# Altium PCB PCB2.PcbDoc
Units mil, origin at the board's own origin, x right, y up, seen from the top; angles counter-clockwise.
Board outline 4825 x 4250 mil, 2 copper layers (Top Layer, Bottom Layer); 112 components, 78 nets, 288 pads, 32 vias.
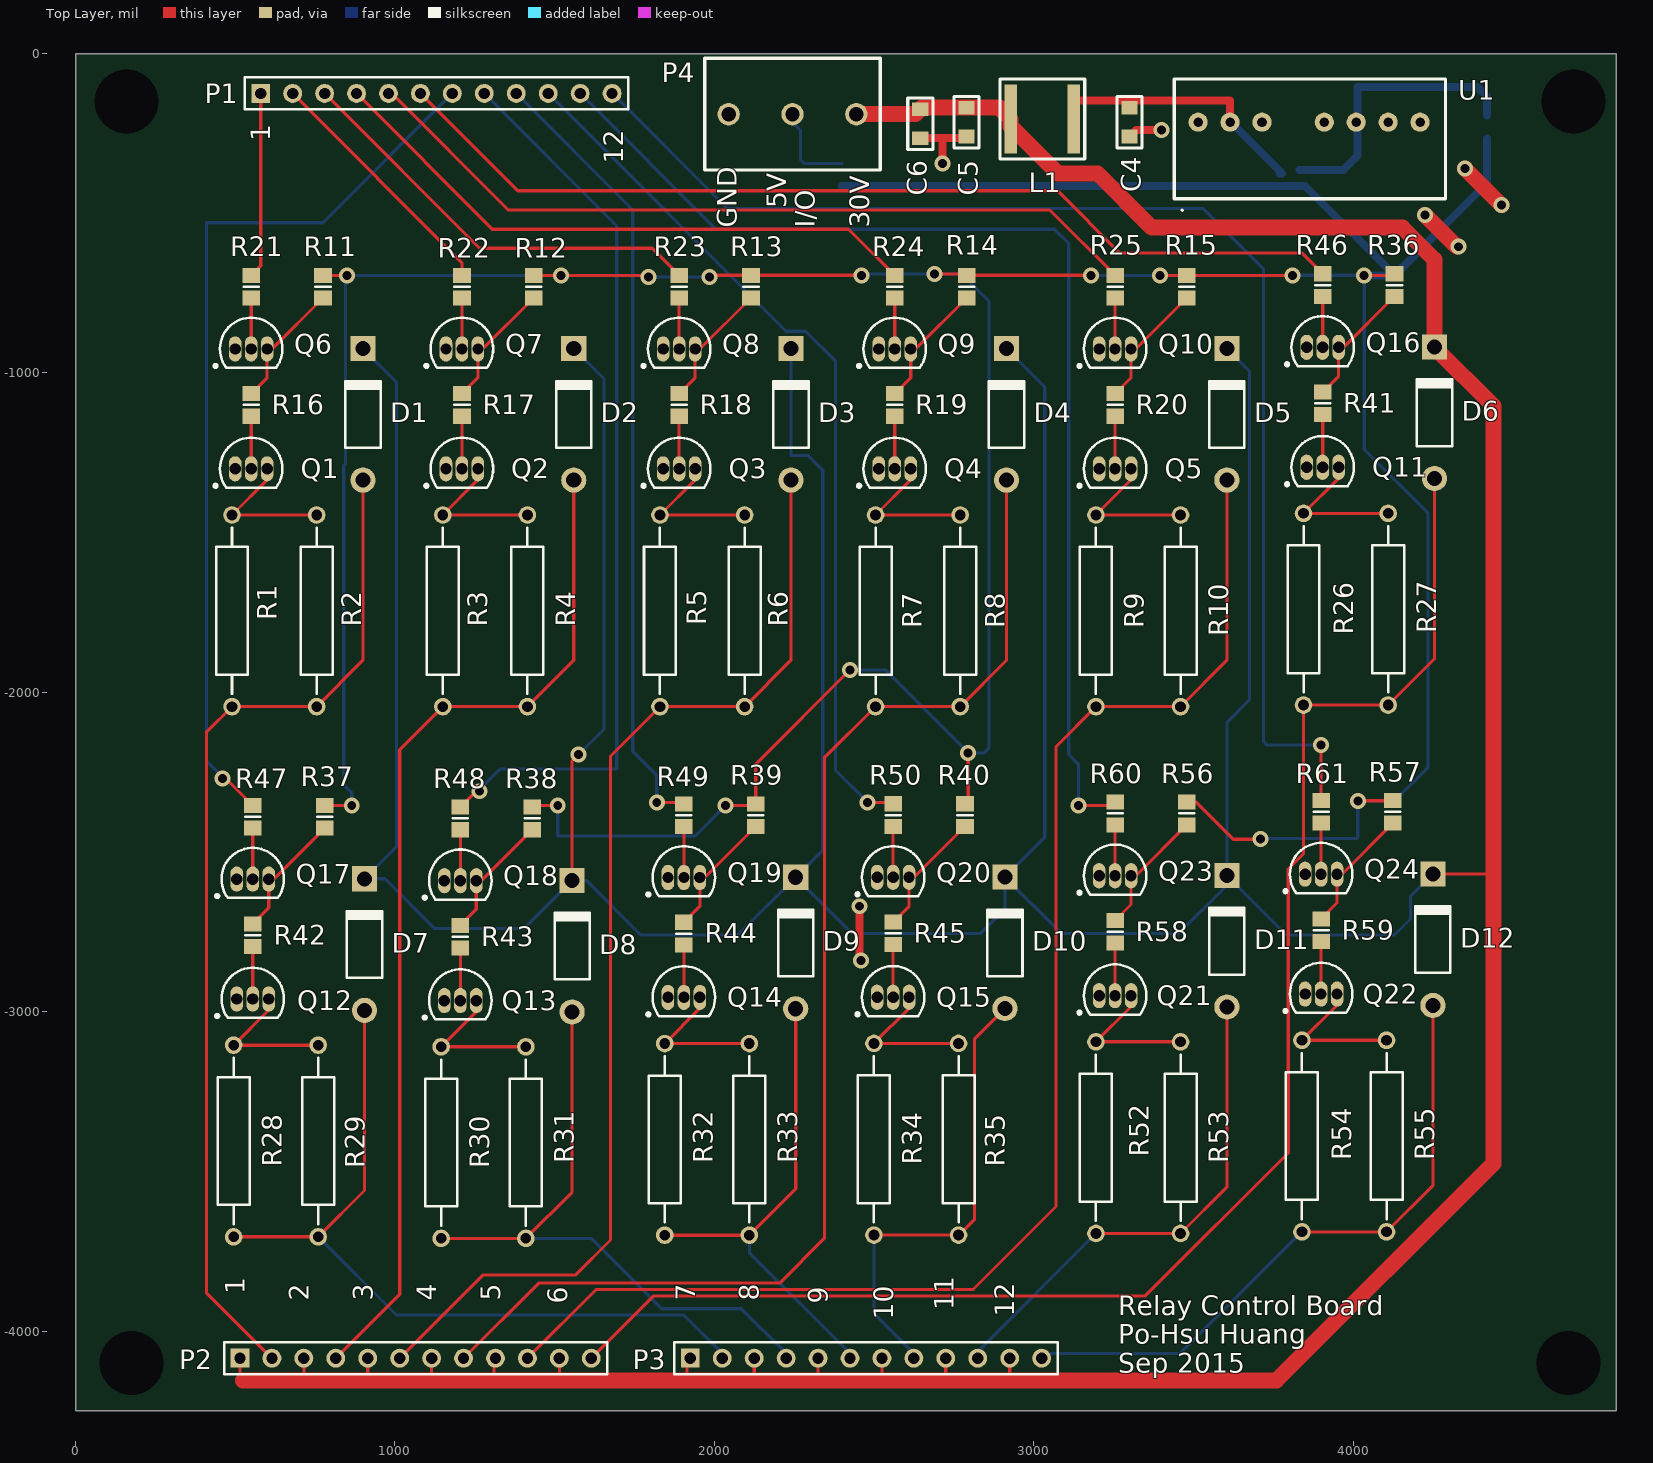
[diagram p0: Top Layer view]
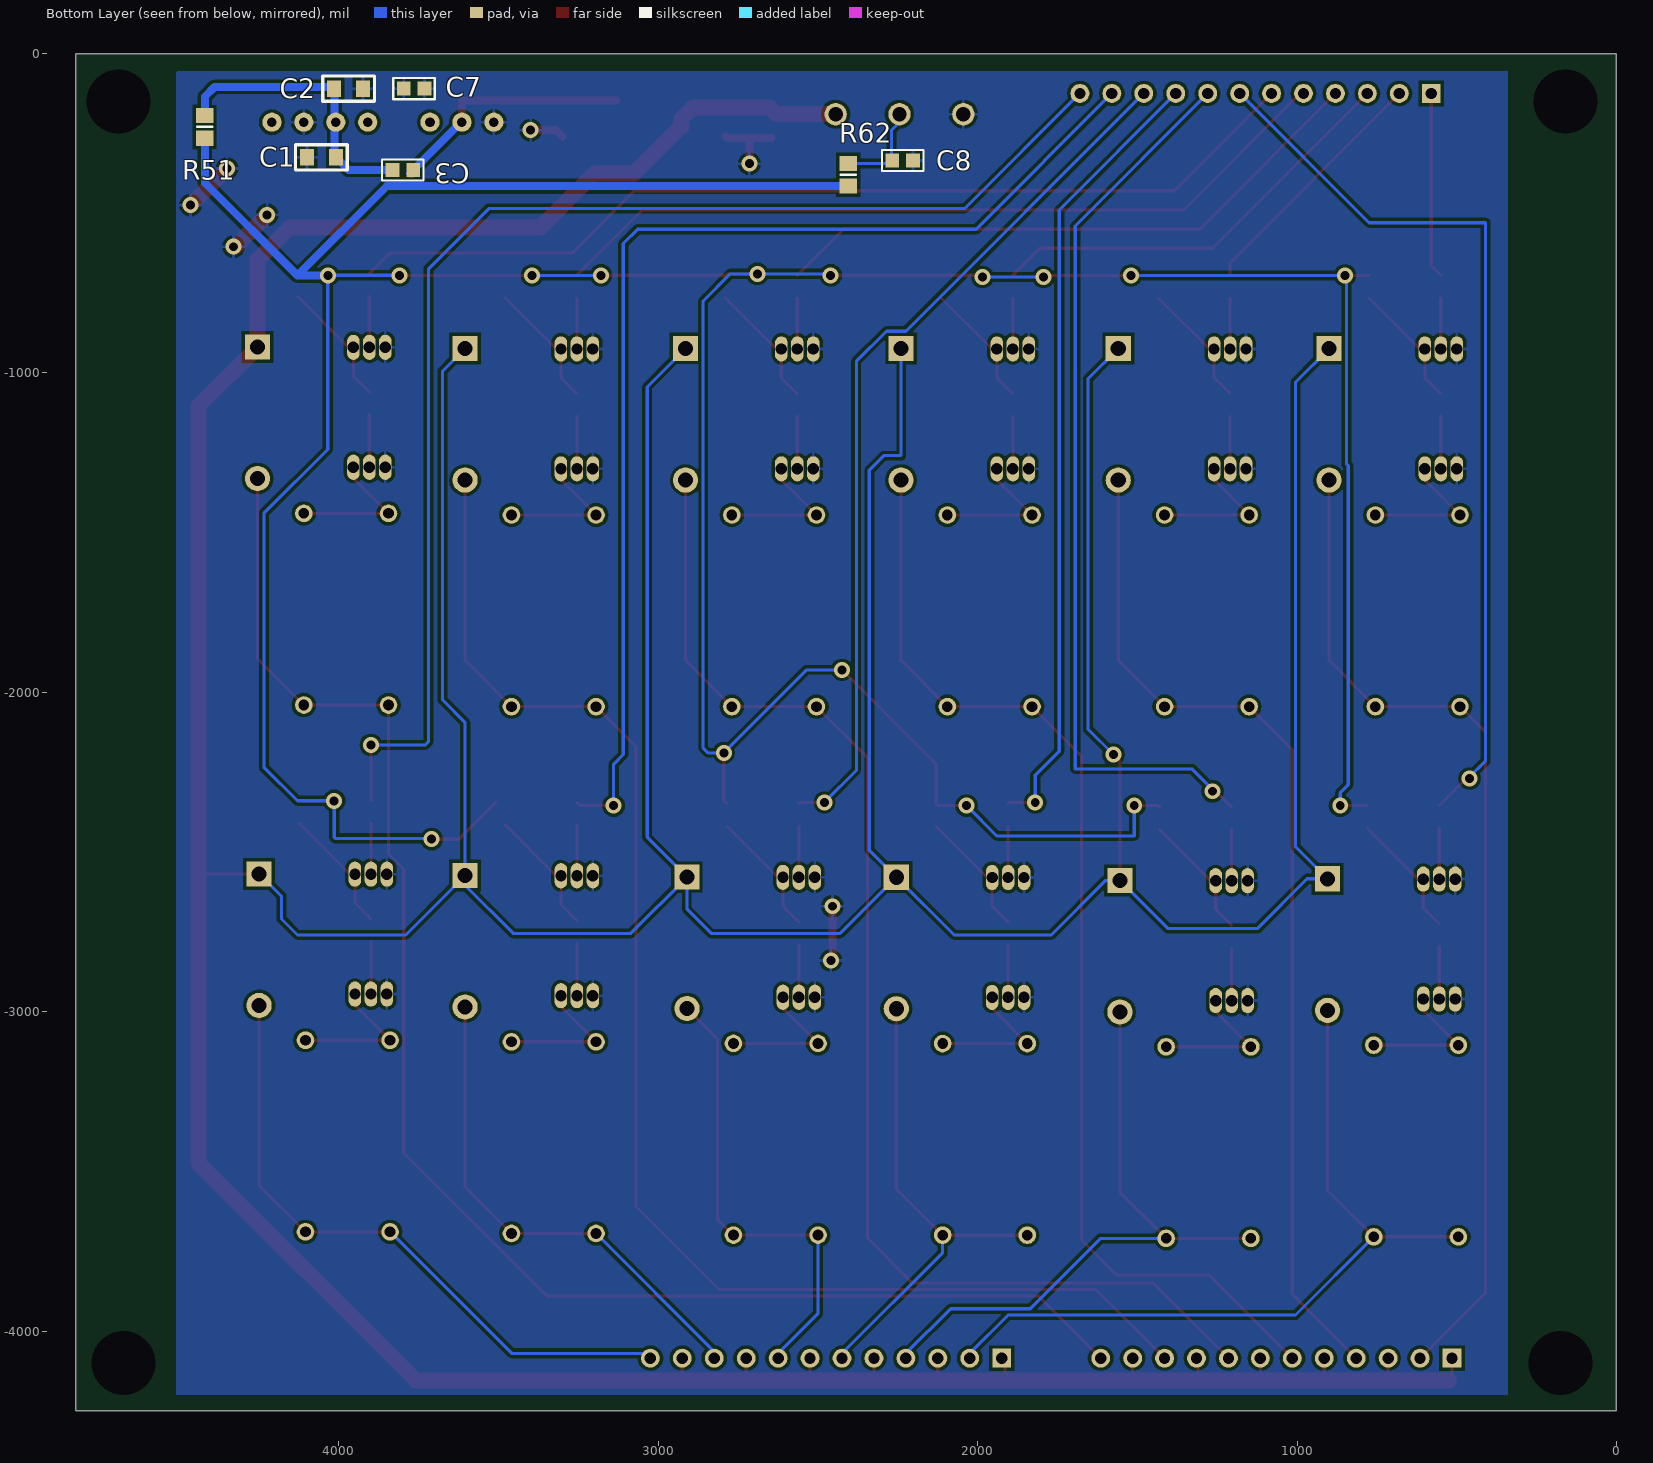
[diagram p1: Bottom Layer view, seen from below]

## Layer stack, top to bottom
Top Solder: solder mask 0.4, Solder Resist, Dk 3.5
Top Layer: signal copper 1.4
Dielectric 1: dielectric 12.6, FR-4, Dk 4.8
Bottom Layer: signal copper 1.4
Bottom Solder: solder mask 0.4, Solder Resist, Dk 3.5

## Board outline
0,0 0,-4250 4825,-4250 4825,0 0,0

## Design rules (kind name [scope] priority, off if disabled: settings)
Clearance [All] p1: gap=10
HoleSize [All] p1: absolutevalues=TRUE maxlimit=300 minlimit=1 maxpercent=80.000 minpercent=20.000
PolygonConnect [All] p1: connectstyle=Relief reliefconductorwidth=10 reliefentries=4 polygonreliefangle="90 Angle" airgapwidth=10
RoutingVias [All] p1: holewidth=28 width=50 viastyle="Through Hole" minholewidth=28 minwidth=50 maxholewidth=28 maxwidth=50
SolderMaskExpansion [All] p1: expansion=4
Width [All] p1: maxlimit=100 minlimit=10 preferedwidth=10 minimp=50.000000 maximp=50.000000 favimp=50.000000
29 further rules are at their usual default settings.

## Components (designator, comment, footprint, x,y, rotation, side; value= is the part's Value field where it differs from the comment)
C1 "Cap 0603" "0805 (2012 metric)" 4055,-325 r0 bottom
C2 "Cap 0603" "0805 (2012 metric)" 3970,-110 r180 bottom
C3 "Cap 0603" "0603 (1608 Metric)" 3800,-365 r0 bottom
C4 "Cap 0603" "0805 (2012 metric)" 3300,-215 r90 top
C5 "Cap 0603" "0805 (2012 metric)" 2790,-215 r90 top
C6 "Cap 0603" "0805 (2012 metric)" 2645,-220 r90 top
C7 "Cap 0603" "0603 (1608 Metric)" 3765,-110 r0 bottom
C8 "Cap 0603" "0603 (1608 Metric)" 2235,-335 r0 bottom
D1 "Diode SB140" DO-41 900,-1130 r90 top
D2 "Diode SB140" DO-41 1560,-1130 r90 top
D3 "Diode SB140" DO-41 2240,-1130 r90 top
D4 "Diode SB140" DO-41 2915,-1130 r90 top
D5 "Diode SB140" DO-41 3605,-1130 r90 top
D6 "Diode SB140" DO-41 4255,-1125 r90 top
D7 "Diode SB140" DO-41 905,-2790 r90 top
D8 "Diode SB140" DO-41 1555,-2795 r90 top
D9 "Diode SB140" DO-41 2255,-2785 r90 top
D10 "Diode SB140" DO-41 2910,-2784.57 r90 top
D11 "Diode SB140" DO-41 3605,-2779.57 r90 top
D12 "Diode SB140" DO-41 4250,-2774.57 r90 top
L1 "Inductor 10uH" "Inductor Surface Mount" 3125,-205 r90 top
P1 "Header 12" HDR1X12 580,-125 r0 top
P2 "Header 12" HDR1X12 515,-4085 r0 top
P3 "Header 12" HDR1X12 1925,-4085 r0 top
P4 "Header 20mils" Header_20mils 2445,-190 r180 top
Q1 "2N3904" TO-92A 550,-1300.43 r270 top
Q2 "2N3904" TO-92A 1210,-1300.43 r270 top
Q3 "2N3904" TO-92A 1890,-1300.43 r270 top
Q4 "2N3904" TO-92A 2565,-1300.43 r270 top
Q5 "2N3904" TO-92A 3255,-1300.43 r270 top
Q6 "2N3904" TO-92A 550,-925 r270 top
Q7 "2N3904" TO-92A 1210,-925 r270 top
Q8 "2N3904" TO-92A 1890,-925 r270 top
Q9 "2N3904" TO-92A 2565,-925 r270 top
Q10 "2N3904" TO-92A 3255,-925 r270 top
Q11 "2N3904" TO-92A 3905,-1295.43 r270 top
Q12 "2N3904" TO-92A 555,-2960.43 r270 top
Q13 "2N3904" TO-92A 1205,-2965.43 r270 top
Q14 "2N3904" TO-92A 1905,-2955.43 r270 top
Q15 "2N3904" TO-92A 2560,-2955 r270 top
Q16 "2N3904" TO-92A 3905,-920 r270 top
Q17 "2N3904" TO-92A 555,-2585 r270 top
Q18 "2N3904" TO-92A 1205,-2590 r270 top
Q19 "2N3904" TO-92A 1905,-2580 r270 top
Q20 "2N3904" TO-92A 2560,-2579.57 r270 top
Q21 "2N3904" TO-92A 3255,-2950 r270 top
Q22 "2N3904" TO-92A 3900,-2945 r270 top
Q23 "2N3904" TO-92A 3255,-2574.57 r270 top
Q24 "2N3904" TO-92A 3900,-2569.57 r270 top
R1 "Res1" AXIAL-0.6 490,-1745 r270 top
R2 "Res1" AXIAL-0.6 755,-1745 r270 top
R3 "Res1" AXIAL-0.6 1150,-1745 r270 top
R4 "Res1" AXIAL-0.6 1415,-1745 r270 top
R5 "Res1" AXIAL-0.6 1830,-1745 r270 top
R6 "Res1" AXIAL-0.6 2095,-1745 r270 top
R7 "Res1" AXIAL-0.6 2505,-1745 r270 top
R8 "Res1" AXIAL-0.6 2770,-1745 r270 top
R9 "Res1" AXIAL-0.6 3195,-1745 r270 top
R10 "Res1" AXIAL-0.6 3460,-1745 r270 top
R11 "Res1" 6-0805_N 775,-730 r90 top
R12 "Res1" 6-0805_N 1435,-730 r90 top
R13 "Res1" 6-0805_N 2115,-730 r90 top
R14 "Res1" 6-0805_N 2790,-730 r90 top
R15 "Res1" 6-0805_N 3480,-730 r90 top
R16 "Res1" 6-0805_N 550,-1100.43 r90 top
R17 "Res1" 6-0805_N 1210,-1100.43 r90 top
R18 "Res1" 6-0805_N 1890,-1100.43 r90 top
R19 "Res1" 6-0805_N 2565,-1100.43 r90 top
R20 "Res1" 6-0805_N 3255,-1100.43 r90 top
R21 "Res1" 6-0805_N 550,-730 r90 top
R22 "Res1" 6-0805_N 1210,-730 r90 top
R23 "Res1" 6-0805_N 1890,-730 r90 top
R24 "Res1" 6-0805_N 2565,-730 r90 top
R25 "Res1" 6-0805_N 3255,-730 r90 top
R26 "Res1" AXIAL-0.6 3845,-1740 r270 top
R27 "Res1" AXIAL-0.6 4110,-1740 r270 top
R28 "Res1" AXIAL-0.6 495,-3405 r270 top
R29 "Res1" AXIAL-0.6 760,-3405 r270 top
R30 "Res1" AXIAL-0.6 1145,-3410 r270 top
R31 "Res1" AXIAL-0.6 1410,-3410 r270 top
R32 "Res1" AXIAL-0.6 1845,-3400 r270 top
R33 "Res1" AXIAL-0.6 2110,-3400 r270 top
R34 "Res1" AXIAL-0.6 2500,-3399.57 r270 top
R35 "Res1" AXIAL-0.6 2765,-3399.57 r270 top
R36 "Res1" 6-0805_N 4130,-725 r90 top
R37 "Res1" 6-0805_N 780,-2390 r90 top
R38 "Res1" 6-0805_N 1430,-2395 r90 top
R39 "Res1" 6-0805_N 2130,-2385 r90 top
R40 "Res1" 6-0805_N 2785,-2384.57 r90 top
R41 "Res1" 6-0805_N 3905,-1095.43 r90 top
R42 "Res1" 6-0805_N 555,-2760.43 r90 top
R43 "Res1" 6-0805_N 1205,-2765.43 r90 top
R44 "Res1" 6-0805_N 1905,-2755.43 r90 top
R45 "Res1" 6-0805_N 2560,-2755 r90 top
R46 "Res1" 6-0805_N 3905,-725 r90 top
R47 "Res1" 6-0805_N 555,-2390 r90 top
R48 "Res1" 6-0805_N 1205,-2395 r90 top
R49 "Res1" 6-0805_N 1905,-2385 r90 top
R50 "Res1" 6-0805_N 2560,-2384.57 r90 top
R51 "Res1" 6-0805_N 4420,-230 r270 bottom
R52 "Res1" AXIAL-0.6 3195,-3394.57 r270 top
R53 "Res1" AXIAL-0.6 3460,-3394.57 r270 top
R54 "Res1" AXIAL-0.6 3840,-3389.57 r270 top
R55 "Res1" AXIAL-0.6 4105,-3389.57 r270 top
R56 "Res1" 6-0805_N 3480,-2379.57 r90 top
R57 "Res1" 6-0805_N 4125,-2374.57 r90 top
R58 "Res1" 6-0805_N 3255,-2750 r90 top
R59 "Res1" 6-0805_N 3900,-2745 r90 top
R60 "Res1" 6-0805_N 3255,-2379.57 r90 top
R61 "Res1" 6-0805_N 3900,-2374.57 r90 top
R62 "Res1" 6-0805_N 2405,-380 r270 bottom
U1 "ITX2405S" ITX2405S 3890,-245 r0 top

## Footprints (in the part's own frame and the unit in brackets; to place one, negate y for a bottom-side part, rotate by r counter-clockwise, add the part's x,y. Pads: shape width x height; smd on the part's side, far side on the other; paste and mask are expansions set on the pad)
6-0805_N [mm] "Chip Resistor, Body 2.0x1.2mm, IPC Medium Density"
  rect 1.2x1.4 smd: 1(-0.9,0) 2(0.9,0)
  silkscreen extent 0,-0.6 0,0.6, body extent -1.07,-0.7 1.07,0.7, height 0.7
"0603 (1608 Metric)" [mm]
  rect 1.1x1.1 smd: 1(-0.825,0) 2(0.825,0)
  silkscreen extent -1.65,-0.84 1.65,0.84
"0805 (2012 metric)" [mm]
  rect 1.1x1.3 smd: 1(-1.15,0) 2(1.15,0)
  silkscreen extent -2.05,-1 2.05,1
AXIAL-0.6 [mm] "Axial Device, Thru-Hole; 2 Leads; 0.6 in Pin Spacing"
  round 1.4 hole 0.85: 1(-7.62,0) 2(7.62,0)
  silkscreen extent -6.6,-1.27 6.6,1.27
DO-41 [mm] "Diode, Axial; Body 5.2 x 2.7 mm (LxDia. max), Lead Dia. 0.86 mm (max)"
  round 2 hole 1.2: 1(-5.23,0)
  rect 2x2 hole 1.2: 2(5.23,0)
  silkscreen extent -2.65,-1.4 2.75,1.4
HDR1X12 [mm] "Connector; Header; 12 Position"
  rect 1.5x1.5 hole 0.9: 1(0,0)
  round 1.5 hole 0.9: 2(2.54,0) 3(5.08,0) 4(7.62,0) 5(10.16,0) 6(12.7,0) 7(15.24,0) 8(17.78,0) 9(20.32,0) 10(22.86,0) 11(25.4,0) 12(27.94,0)
  silkscreen extent -1.27,-1.27 29.21,1.27
Header_20mils [mil]
  round 70 hole 45: 1(0,0) 2(200,0) 3(400,0)
  silkscreen extent -75,-175 475,175
"Inductor Surface Mount" [mm] "744043100"
  rect 5.5x1 smd: 1(0,0) 2(0,5)
  silkscreen extent -3.18,-0.89 3.17,5.84
ITX2405S [mil] "ITX2405S"
  round 60 hole 30: 1(-375,30) 2(-275,30) 3(-175,30) 5(20,30) 6(120,30) 7(220,30) 8(320,30)
  silkscreen extent -450,-247 400,165
TO-92A [mm] "TO, Flat Index; 3 In-Line, Axial Leads; Body Dia. 4.5mm; Leads 0.51 x 0.48 mm (max)"
  oval 2x1 hole 0.9: 1(0,-1.27) 2(0,0) 3(0,1.27)
  silkscreen extent -2.48,-2.95 1.5,2.48, body extent -2.5,-2.5 1.5,2.5, height 6.86

## Part data
C1 C2 C3 C4 C5 C6 C7 C8: "0603 Cap"
D1 D2 D3 D4 D5 D6 D7 D8 D9 D10 D11 D12: library part "Diode 1N4006", "1 Amp General Purpose Rectifier"
L1: "Surface Mount Inductor 744043100"
P1 P2 P3: "Header, 12-Pin"
Q1 Q2 Q3 Q4 Q5 Q6 Q7 Q8 Q9 Q10 Q11 Q12 Q13 Q14 Q15 Q16 Q17 Q18 Q19 Q20 Q21 Q22 Q23 Q24: "NPN General Purpose Amplifier"
R1 R2 R3 R4 R5 R6 R7 R8 R9 R10 R11 R12 R13 R14 R15 R16 R17 R18 R19 R20 R21 R22 R23 R24 R25 R26 R27 R28 R29 R30 R31 R32 R33 R34 R35 R36 R37 R38 R39 R40 R41 R42 R43 R44 R45 R46 R47 R48 R49 R50 R51 R52 R53 R54 R55 R56 R57 R58 R59 R60 R61 R62: "Resistor"

## Free pads (board coordinates)
  round 60 hole 200: ""(160,-150) ""(175,-4100) ""(4675,-4100) ""(4690,-150)

## Via types
v1: diameter 50, hole 28, Top Layer to Bottom Layer, 32 vias

## Nets (pads, with @x,y where several pads share a name; then routed paths per layer and width w, separated by ;. In a path a pad name is that pad's centre, name@x,y a point inside that pad or via, vN(x,y) a via of type N, cw(c..) or ccw(c..) an arc to the next point about the centre after c; other vN are vias at no path point)
5V: R11.2 R12.2 R13.2 R14.2 R15.2 R36.2 R37.2 R38.2 R39.2 R40.2 R51.2 R56.2 R57.2 R62.2 | length 14169.9
  Top Layer w10: R11.2 775.43,-695 v1(850,-695) ; R37.2 v1@864.57,-2354.57 ; R38.2 1434.57,-2355 v1(1510,-2355) ; R12.2@1435.43,-695 v1(1520,-695) 1799.13,-695 v1(1794.13,-700) ; v1(1985,-700) 1990.43,-694.57 R13.2 v1(2460.43,-694.57) ; v1(2035,-2355) 2124.57,-2355 R39.2 2130,-2225 v1(2425,-1930) ; v1(2690,-690) 2785.43,-690 R14.2 v1(3179.57,-694.57) ; R40.2 2795,-2339.13 v1(2795,-2190) ; v1(3395,-695) 3810,-695 v1(3810.43,-694.57) ; 3509.13,-2344.13 3625,-2460 v1(3710,-2460) ; v1(4015,-2340) 4124.13,-2340 R57.2 ; v1(4035,-695) 4124.57,-695 R36.2
  Bottom Layer w10: v1(865,-2355) 865,-2315 840,-2290 840,-1290 845.63,-1284.37 845.63,-699.37 v1(850,-695) v1(1520,-695) ; v1(1510,-2355) 1510,-2450 1940,-2450 v1(2035,-2355) ; v1(1794.13,-700) v1(1985,-700) ; v1(2425,-1930) 2535,-1930 v1(2795,-2190) 2845,-2190 2860,-2175 2860,-775 2775,-690 v1(2690,-690) 2465,-690 v1(2460.43,-694.57) ; v1(3179.57,-694.57) 3180,-695 v1(3395,-695) ; v1(3710,-2460) 3712.5,-2457.5 4012.5,-2457.5 4015,-2455 v1(4015,-2340) 4130,-2340 4235,-2235 4235,-1440 4035,-1240 v1(4035,-695) ; v1(3810.43,-694.57) 4129.57,-694.57
  Bottom Layer w25: R62.2@2400,-415.43 3850.43,-415.43 4129.57,-694.57 4129.13,-695 ; v1(4035,-695) 4129.13,-695 ; R51.2 4420,-405 4130,-695 4129.13,-695
30V: C5.2 C6.2 D1.2 D2.2 D3.2 D4.2 D5.2 D6.2 D7.2 D8.2 D9.2 D10.2 D11.2 D12.2 L1.2 P2.1 P2.3 P2.5 P2.7 P2.9 P2.11 P3.1 P3.3 P3.5 P3.7 P3.9 P3.11 P4.1 | length 23006.9
  Top Layer w10: 515,-4150 P2.1 ; 715,-4150 P2.3 ; 915,-4150 P2.5 ; 1115,-4150 P2.7 ; 1310,-4150 P2.9@1310,-4090 ; 1515,-4150 P2.11 ; D8.2 1555,-2215 v1(1575,-2195) ; 1915,-4150 P3.1@1915,-4080 ; 2125,-4150 P3.3 ; 2325,-4150 P3.5 ; 2525,-4150 P3.7 ; 2725,-4150 P3.9 ; 2925,-4150 P3.11 ; D12.2 4438.66,-2568.66
  Top Layer w50: 525,-4155 3760,-4155 4440,-3475 4440,-1104.09 D6.2 4255,-645 4155,-545 3370,-545 3200,-375 3075,-375 2928.15,-228.15 L1.2 2892.87,-169.72 C5.2 2650,-169.72 C6.2 2629.72,-190 P4.1
  Bottom Layer w10: D1.2 1005,-1029.09 1005,-2484.09 D7.2 969.09,-2584.09 1125,-2740 1404.09,-2740 D8.2 1599.09,-2589.09 1770,-2760 2074.09,-2760 D9.2 ; D2.2 1655,-1019.09 1655,-2115 v1(1575,-2195) ; D3.2 2240,-1259.01 2294.01,-1259.01 2340,-1305 2340,-2494.09 D9.2 ; D4.2 3035,-1044.09 3035,-2453.66 D10.2 ; D5.2 3675.91,-995 3675.91,-2024.09 3605,-2095 D11.2 ; D12.2 4180,-2638.66 4180,-2710 4130,-2760 3791.34,-2760 D11.2 ; D9.2 2430.91,-2755 2835,-2755 2910,-2680 D10.2 ; D10.2 3086.34,-2755 3455,-2755 3605,-2605 D11.2
GND: C1.2 C2.2 C4.1 C5.1 C6.1 C7.1 C7.2 C8.1 P4.3 Q1.1 Q2.1 Q3.1 Q4.1 Q5.1 Q6.1 Q7.1 Q8.1 Q9.1 Q10.1 Q11.1 Q12.1 Q13.1 Q14.1 Q15.1 Q16.1 Q17.1 Q18.1 Q19.1 Q20.1 Q21.1 Q22.1 Q23.1 Q24.1 U1.1 U1.7 | length 816.3
  Top Layer w25: v1(2455,-2670) 2455,-2835 v1(2460,-2840) ; C6.1 2715,-265.28 ; v1(2715,-345) 2715,-265.28 ; C5.1 2785,-265.28 2715,-265.28 ; C4.1 3320.28,-240 v1(3400,-240) ; v1@4325,-605 v1(4330,-605)
  Top Layer w50: v1(4225,-505) v1@4325,-605 ; v1(4350,-360) v1(4465,-475)
NetC1_1: C1.1 C2.1 C3.2 R51.1 U1.6 | length 892.9
  Bottom Layer w25: C3.2 3969.72,-365 C1.1 4014.72,-320 4014.72,-105 4389.57,-105 4420,-135.43 R51.1
NetC3_1: C3.1 C4.2 L1.1 U1.2 | length 798.8
  Top Layer w25: L1.1@3132.5,-147.5 3615,-147.5 U1.2@3615,-230
  Bottom Layer w25: U1.2@3617.52,-215 3777.52,-375 C3.1@3770,-375
NetC8_2: C8.2 P4.2 R62.1 | length 301.1
  Bottom Layer w10: P4.2@2235,-195 2225,-195 2270,-240 2270,-332.48 2282.09,-344.57 R62.1@2400,-344.57
NetD1_1: D1.1 P2.2 R1.2 R2.2 | length 3192.2
  Top Layer w10: P2.2 410,-3880 410,-2125 R1.2 R2.2 900,-1900 D1.1
NetD2_1: D2.1 P2.4 R3.2 R4.2 | length 3212.9
  Top Layer w10: P2.4 1015,-3885 1015,-2180 R3.2 R4.2 1560,-1900 D2.1
NetD3_1: D3.1 P2.6 R5.2 R6.2 | length 3581.6
  Top Layer w10: P2.6 1275,-3825 1565,-3825 1675,-3715 1675,-2200 R5.2 R6.2 2240,-1900 D3.1
NetD4_1: D4.1 P2.8 R7.2 R8.2 | length 4050.8
  Top Layer w10: P2.8 1450,-3850 2205,-3850 2345,-3710 2345,-2205 R7.2 R8.2 2915,-1900 D4.1
NetD5_1: D5.1 P2.10 R9.2 R10.2 | length 4502.7
  Top Layer w10: P2.10 1630,-3870 2810,-3870 3070,-3610 3070,-2170 R9.2 R10.2 3605,-1900 D5.1
NetD6_1: D6.1 P2.12 R26.2 R27.2 | length 4905
  Top Layer w10: P2.12 1810,-3890 3350,-3890 3797.44,-3442.56 3797.44,-2553.39 3845,-2505.83 R26.2 R27.2 4255,-1895 D6.1
NetD7_1: D7.1 P3.2 R28.2 R29.2 | length 2450.3
  Top Layer w10: R28.2 R29.2 905,-3560 D7.1
  Bottom Layer w10: R29.2 1005,-3950 1905,-3950 P3.2@2025,-4070
NetD8_1: D8.1 P3.4 R30.2 R31.2 | length 1998.3
  Top Layer w10: R30.2 R31.2 1555,-3565 D8.1
  Bottom Layer w10: R31.2 1615,-3710 1835,-3930 2085,-3930 P3.4@2225,-4070
NetD9_1: D9.1 P3.6 R32.2 R33.2 | length 1534.6
  Top Layer w10: R32.2 R33.2 2255,-3555 D9.1
  Bottom Layer w10: R33.2 2110,-3755 P3.6@2425,-4070
NetD10_1: D10.1 P3.8 R34.2 R35.2 | length 1456.4
  Top Layer w10: R34.2 R35.2 2815,-3649.57 2815,-3085.47 D10.1
  Bottom Layer w10: R34.2 2500,-3945 P3.8@2625,-4070
NetD11_1: D11.1 P3.10 R52.2 R53.2 | length 1562.8
  Top Layer w10: R52.2 R53.2 3605,-3549.57 D11.1
  Bottom Layer w10: P3.10 P3.10@2825,-4079.57 ; P3.10@2825,-4064.57 R52.2
NetD12_1: D12.1 P3.12 R54.2 R55.2 | length 2006.7
  Top Layer w10: R54.2 R55.2 4250,-3544.57 D12.1
  Bottom Layer w10: P3.12@3025,-4070 3459.57,-4070 R54.2
NetP1_1: P1.1 R21.2 | length 582
  Top Layer w10: R21.2 580,-664.57 P1.1
NetP1_2: P1.2 R22.2 | length 789.1
  Top Layer w10: P1.2 1210,-655 R22.2
NetP1_3: P1.3 R23.2 | length 1345.9
  Top Layer w10: P1.3 1265,-610 1805.43,-610 R23.2
NetP1_4: P1.4 R24.2 | length 1920.9
  Top Layer w10: P1.4 1305,-550 2420.43,-550 R24.2
NetP1_5: P1.5 R25.2 | length 2510.9
  Top Layer w10: P1.5 990,-125 1355,-490 3050.43,-490 R25.2
NetP1_6: P1.6 R46.2 | length 3058.9
  Top Layer w10: P1.6 1385,-430 3075,-430 3270,-625 3840.43,-625 R46.2
NetP1_7: P1.7 R47.2 | length 2841.8
  Top Layer w10: v1(460,-2270) 470.43,-2270 R47.2 ; P1.7@1180,-130 P1.7
  Bottom Layer w10: v1(460,-2270) 465.87,-2270 410,-2214.13 410,-530 775,-530 P1.7
NetP1_8: P1.8 R48.2 | length 2836.4
  Top Layer w10: R48.2 1254.57,-2310 v1(1265,-2310)
  Bottom Layer w10: v1(1265,-2310) 1260,-2310 1330,-2240 1695,-2240 1695,-540 P1.8
NetP1_9: P1.9 R49.2 | length 2489.1
  Top Layer w10: v1(1820,-2345) 1900.43,-2345 R49.2
  Bottom Layer w10: P1.9 1745,-490 1745,-2185 1820,-2260 v1(1820,-2345)
NetP1_10: P1.10 R50.2 | length 2751.6
  Top Layer w10: v1(2480,-2345) 2555.87,-2345 R50.2
  Bottom Layer w10: P1.10 2224.72,-869.72 2285.58,-869.72 2380,-964.14 2380,-2245 v1(2480,-2345)
NetP1_11: P1.11 R60.2 | length 3621.6
  Top Layer w10: P1.11@1575,-125 P1.11 ; v1(3140,-2355) 3244.13,-2355 R60.2
  Bottom Layer w10: P1.11 2005,-550 3065,-550 3110,-595 3110,-2195 3140,-2225 v1(3140,-2355)
NetP1_12: P1.12 R61.2 | length 4106.1
  Top Layer w10: R61.2 v1(3900,-2165)
  Bottom Layer w10: P1.12 2040,-485 3530,-485 3720,-675 3720,-2155 3730,-2165 v1(3900,-2165)
NetQ1_2: Q1.2 R16.1 | length 164.6
  Top Layer w10: Q1.2 R16.1
NetQ1_3: Q1.3 R1.1 R2.1 | length 455.1
  Top Layer w10: Q1.3 600,-1335 R1.1 R2.1
NetQ2_2: Q2.2 R17.1 | length 164.6
  Top Layer w10: Q2.2 R17.1
NetQ2_3: Q2.3 R3.1 R4.1 | length 455.1
  Top Layer w10: Q2.3 1260,-1335 R3.1 R4.1
NetQ3_2: Q3.2 R18.1 | length 164.6
  Top Layer w10: Q3.2 R18.1
NetQ3_3: Q3.3 R5.1 R6.1 | length 455.1
  Top Layer w10: Q3.3 1940,-1335 R5.1 R6.1
NetQ4_2: Q4.2 R19.1 | length 164.6
  Top Layer w10: Q4.2 R19.1
NetQ4_3: Q4.3 R7.1 R8.1 | length 455.1
  Top Layer w10: Q4.3 2615,-1335 R7.1 R8.1
NetQ5_2: Q5.2 R20.1 | length 164.6
  Top Layer w10: Q5.2 R20.1
NetQ5_3: Q5.3 R9.1 R10.1 | length 455.1
  Top Layer w10: Q5.3 3305,-1335 R9.1 R10.1
NetQ6_2: Q6.2 R21.1 | length 159.6
  Top Layer w10: Q6.2 R21.1
NetQ6_3: Q6.3 R11.1 R16.2 | length 386.4
  Top Layer w10: R16.2 600,-1015 Q6.3 ; Q6.3@615.43,-925 R11.1
NetQ7_2: Q7.2 R22.1 | length 159.6
  Top Layer w10: Q7.2 R22.1
NetQ7_3: Q7.3 R12.1 R17.2 | length 386.4
  Top Layer w10: R17.2 1260,-1015 Q7.3 ; Q7.3@1275.43,-925 R12.1
NetQ8_2: Q8.2 R23.1 | length 159.6
  Top Layer w10: Q8.2 R23.1
NetQ8_3: Q8.3 R13.1 R18.2 | length 386.4
  Top Layer w10: R18.2 1940,-1015 Q8.3 ; Q8.3@1955.43,-925 R13.1
NetQ9_2: Q9.2 R24.1 | length 159.6
  Top Layer w10: Q9.2 R24.1
NetQ9_3: Q9.3 R14.1 R19.2 | length 386.4
  Top Layer w10: R19.2 2615,-1015 Q9.3 ; Q9.3@2630.43,-925 R14.1
NetQ10_2: Q10.2 R25.1 | length 159.6
  Top Layer w10: Q10.2 R25.1
NetQ10_3: Q10.3 R15.1 R20.2 | length 386.4
  Top Layer w10: R20.2 3305,-1015 Q10.3 ; Q10.3@3320.43,-925 R15.1
NetQ11_2: Q11.2 R41.1 | length 164.6
  Top Layer w10: Q11.2 R41.1
NetQ11_3: Q11.3 R26.1 R27.1 | length 455.1
  Top Layer w10: Q11.3 3955,-1330 R26.1 R27.1
NetQ12_2: Q12.2 R42.1 | length 164.6
  Top Layer w10: Q12.2 R42.1
NetQ12_3: Q12.3 R28.1 R29.1 | length 455.1
  Top Layer w10: Q12.3 605,-2995 R28.1 R29.1
NetQ13_2: Q13.2 R43.1 | length 164.6
  Top Layer w10: Q13.2 R43.1
NetQ13_3: Q13.3 R30.1 R31.1 | length 455.1
  Top Layer w10: Q13.3 1255,-3000 R30.1 R31.1
NetQ14_2: Q14.2 R44.1 | length 164.6
  Top Layer w10: Q14.2 R44.1
NetQ14_3: Q14.3 R32.1 R33.1 | length 455.1
  Top Layer w10: Q14.3 1955,-2990 R32.1 R33.1
NetQ15_2: Q15.2 R45.1 | length 164.6
  Top Layer w10: Q15.2 R45.1
NetQ15_3: Q15.3 R34.1 R35.1 | length 455.1
  Top Layer w10: Q15.3 2610,-2989.57 R34.1 R35.1
NetQ16_2: Q16.2 R46.1 | length 159.6
  Top Layer w10: Q16.2 R46.1
NetQ16_3: Q16.3 R36.1 R41.2 | length 386.4
  Top Layer w10: R41.2 3955,-1010 Q16.3 ; Q16.3@3970.43,-920 R36.1
NetQ17_2: Q17.2 R47.1 | length 159.6
  Top Layer w10: Q17.2 R47.1
NetQ17_3: Q17.3 R37.1 R42.2 | length 386.4
  Top Layer w10: R42.2 605,-2675 Q17.3 ; Q17.3@620.43,-2585 R37.1
NetQ18_2: Q18.2 R48.1 | length 159.6
  Top Layer w10: Q18.2 R48.1
NetQ18_3: Q18.3 R38.1 R43.2 | length 386.4
  Top Layer w10: R43.2 1255,-2680 Q18.3 ; Q18.3@1270.43,-2590 R38.1
NetQ19_2: Q19.2 R49.1 | length 159.6
  Top Layer w10: Q19.2 R49.1
NetQ19_3: Q19.3 R39.1 R44.2 | length 386.4
  Top Layer w10: R44.2 1955,-2670 Q19.3 ; Q19.3@1970.43,-2580 R39.1
NetQ20_2: Q20.2 R50.1 | length 159.6
  Top Layer w10: Q20.2 R50.1
NetQ20_3: Q20.3 R40.1 R45.2 | length 386.4
  Top Layer w10: R45.2 2610,-2669.57 Q20.3 ; Q20.3@2625.43,-2579.57 R40.1
NetQ21_2: Q21.2 R58.1 | length 164.6
  Top Layer w10: Q21.2 R58.1
NetQ21_3: Q21.3 R52.1 R53.1 | length 455.1
  Top Layer w10: Q21.3 3305,-2984.57 R52.1 R53.1
NetQ22_2: Q22.2 R59.1 | length 164.6
  Top Layer w10: Q22.2 R59.1
NetQ22_3: Q22.3 R54.1 R55.1 | length 455.1
  Top Layer w10: Q22.3 3950,-2979.57 R54.1 R55.1
NetQ23_2: Q23.2 R60.1 | length 159.6
  Top Layer w10: Q23.2 R60.1
NetQ23_3: Q23.3 R56.1 R58.2 | length 386.4
  Top Layer w10: R58.2 3305,-2664.57 Q23.3 ; Q23.3@3320.43,-2574.57 R56.1
NetQ24_2: Q24.2 R61.1 | length 159.6
  Top Layer w10: Q24.2 R61.1
NetQ24_3: Q24.3 R57.1 R59.2 | length 386.4
  Top Layer w10: R59.2 3950,-2659.57 Q24.3 ; Q24.3@3965.43,-2569.57 R57.1
pads on no net: U1.3 U1.5 U1.8

## Polygon pours and split planes (outlines as drawn)
GND on Bottom Layer "GND" (solid, pour order 8): 340,-55 340,-4200 4510,-4200 4510,-60 4505,-55

## Silkscreen, mask and mechanical layers (free items; w line width, h text height)
Top Overlay:
  text "1" at 610,-275.05 h60 r90
  text "12" at 1715,-345.02 h60 r90
  text "5V" at 2225,-485.02 h60 r90
  text "GND" at 2070,-545 h60 r90
  text "I/O" at 2315,-545 h60 r90
  text "30V" at 2485,-545 h60 r90
  text "1" at 530,-3885.05 h60 r90
  text "2" at 730,-3905.04 h60 r90
  text "3" at 930,-3905.04 h60 r90
  text "4" at 1130,-3905 h60 r90
  text "5" at 1330,-3905 h60 r90
  text "7" at 1940,-3905.04 h60 r90
  text "8" at 2140,-3905.04 h60 r90
  text "6" at 1540,-3915.04 h60 r90
  text "9" at 2355,-3915 h60 r90
  text "11" at 2750,-3935.03 h60 r90
  text "12" at 2940,-3955 h60 r90
  text "10" at 2560,-3965 h60 r90
  text "Relay Control Board / Po-Hsu Huang / Sep 2015" at 3265,-4130 h60
Mechanical 1:
  the board outline again, w10

## Dimensions
4825,0 to 4825,-4250 on Mechanical 1
0,0 to 4825,0 on Mechanical 1